# Altium PCB BlasterAmp.PcbDoc
Units mil, origin at the board's own origin, x right, y up, seen from the top; angles counter-clockwise.
Board outline 4720 x 3920 mil, 2 copper layers (Top Layer, Bottom Layer), stack 64.8 mil thick; 78 components, 49 nets, 231 pads, 60 vias.
Unrouted connection lines stored in the file: 41.
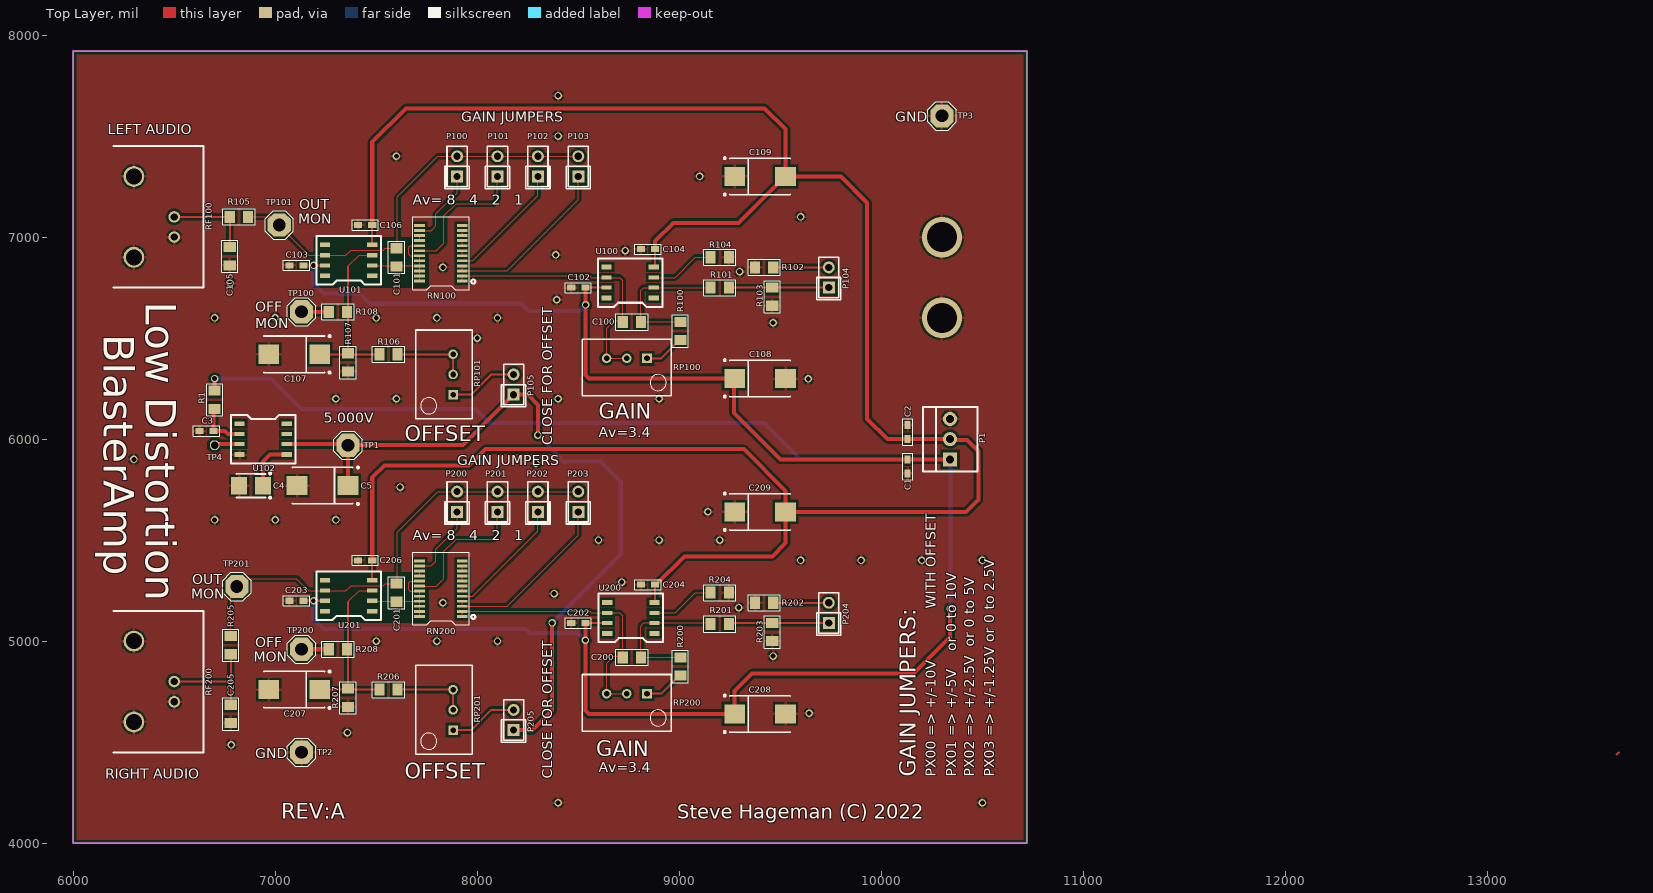
[diagram p0: Top Layer view]
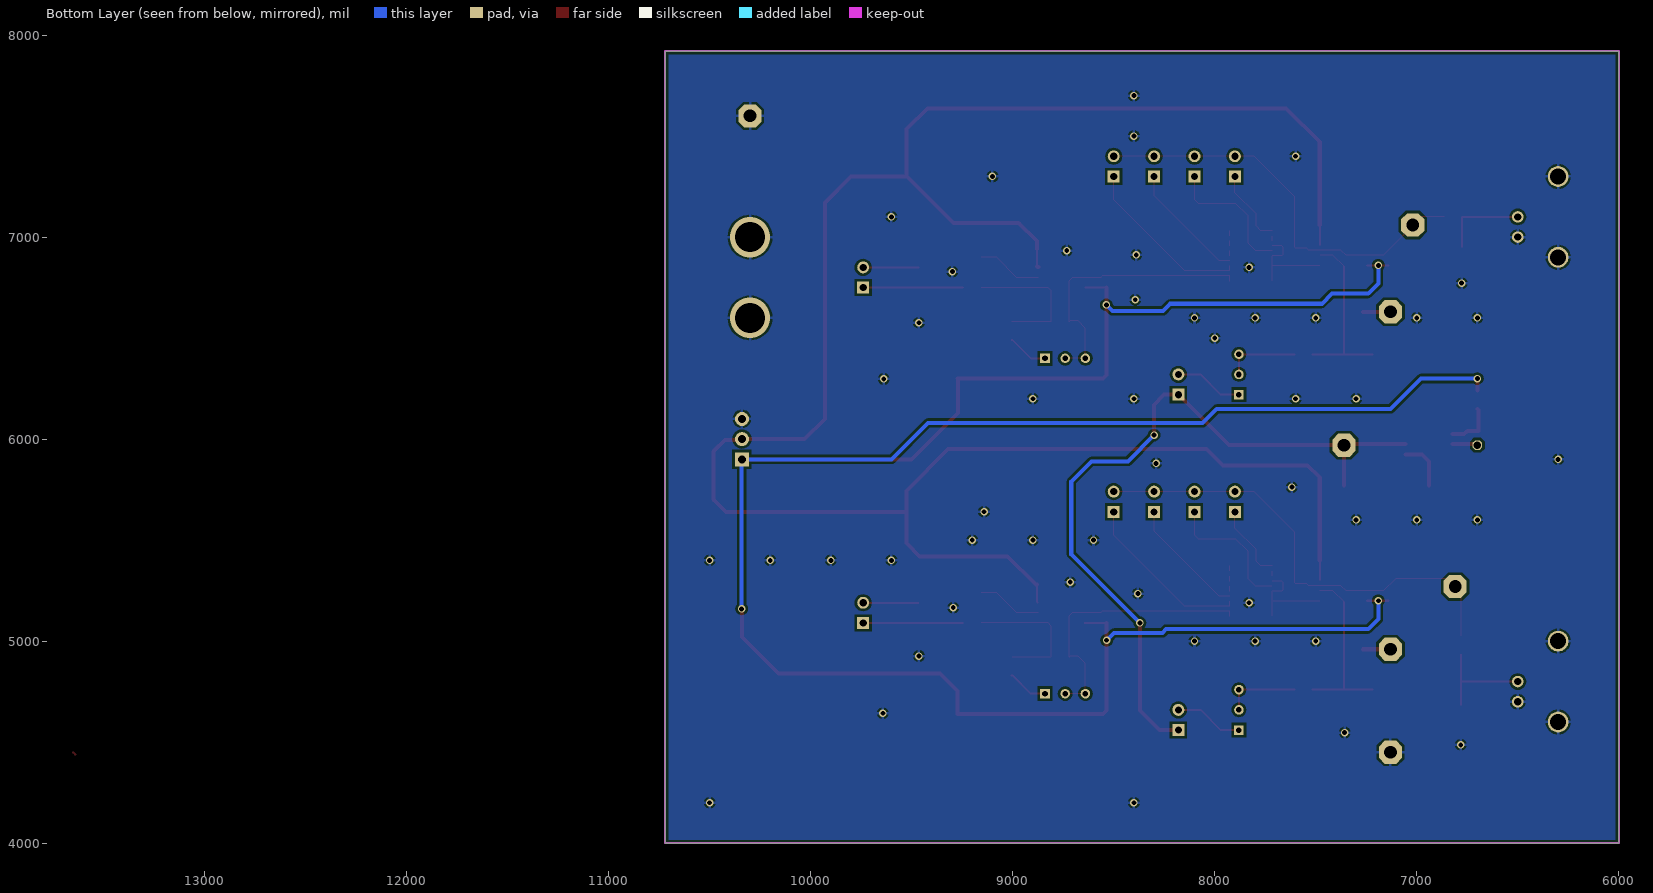
[diagram p1: Bottom Layer view, seen from below]

## Layer stack, top to bottom
Top Solder: solder mask 0.4, Solder Resist, Dk 3.5
Top Layer: signal copper 1.4
Dielectric1: core 62, FR-4, Dk 4.8
Bottom Layer: signal copper 1.4
Bottom Solder: solder mask 0.4, Solder Resist, Dk 3.5

## Board outline
6000,4000 10720,4000 10720,7920 6000,7920

## Design rules (kind name [scope] priority, off if disabled: settings)
BackDrilling [All] p1: maxstublength=120 usetopbackdrill=TRUE usebottombackdrill=TRUE holeoversize=1 holetolplus=0 holetolminus=0
Clearance "Fanout U1" [InComponent('U1')] p1: gap=6 ignorepadtopadclearanceinfootprint=FALSE except(0: Arc-Hole Track-Hole SMDPad-Hole THPad-Hole Via-Hole Fill-Hole Poly-Hole Region-Hole Text-Hole; 15: SMDPad-Via)
Clearance "PAD Keepout" [(InPadClass('All Pads')) vs (InPoly)] p2: gap=12 ignorepadtopadclearanceinfootprint=FALSE except(0: Arc-Hole Track-Hole SMDPad-Hole THPad-Hole Via-Hole Fill-Hole Poly-Hole Region-Hole Text-Hole) // 7 Mil Keepout
Clearance "GND Planes" [(inPoly)] p3: gap=12 ignorepadtopadclearanceinfootprint=FALSE except(0: Arc-Hole Track-Hole SMDPad-Hole THPad-Hole Via-Hole Fill-Hole Poly-Hole Region-Hole Text-Hole) // 12 mil Clearence
Clearance [All] p4: gap=6 ignorepadtopadclearanceinfootprint=FALSE except(0: Arc-Hole Track-Hole SMDPad-Hole THPad-Hole Via-Hole Fill-Hole Poly-Hole Region-Hole Text-Hole)
FanoutControl Fanout_Default [All] p1: bgadir=Out bgaviamode=Centered fanoutstyle=Auto fanoutdirection=OutOnly viagrid=1 // Fanout_Default (Default Rule)
Height [All] p1: minheight=-1 maxheight=1000 prefheight=500
HoleSize [All] p1: absolutevalues=TRUE maxlimit=250 minlimit=8 maxpercent=80.000 minpercent=20.000
HoleToHoleClearance [All] p1: gap=12 allowstackedmicrovias=FALSE
MinimumAnnularRing [All] p1: minimumring=6
MinimumSolderMaskSliver [All] p1: minsoldermaskwidth=3
PlaneClearance [All] p1: clearance=12
PlaneConnect [All] p1: planeconnectstyle=Relief reliefexpansion=12 reliefentries=4 reliefconductorwidth=10 reliefairgap=10
PolygonConnect PolygonConnect_100Pin [InNet('GND') AND InComponent('JC1')] p1: connectstyle=NoConnect reliefconductorwidth=20 reliefentries=4 polygonreliefangle="90 Angle" airgapwidth=10
PolygonConnect PolygonConnect_Gnd_Vias_YIG [InNet('GND') AND IsVia AND (AsMils(PadXSize_AllLayers) =140.0)] p2: connectstyle=Direct reliefconductorwidth=10 reliefentries=4 polygonreliefangle="90 Angle" airgapwidth=10
PolygonConnect PolygonConnect_Gnd_Vias_1 [InNet('GND') AND IsVia AND (AsMils(PadXSize_AllLayers) = 25.0)] p3: connectstyle=Direct reliefconductorwidth=10 reliefentries=4 polygonreliefangle="90 Angle" airgapwidth=10
PolygonConnect PolygonConnect_Gnd_Vias [InNet('GND') AND IsVia AND (AsMils(PadXSize_AllLayers) = 27.0)] p4: connectstyle=Direct reliefconductorwidth=10 reliefentries=4 polygonreliefangle="90 Angle" airgapwidth=10
PolygonConnect PolygonConnect_1206 [InNet('GND') AND IsPad AND (AsMils(PadXSize_AllLayers) = 60.0)] p5: connectstyle=Direct reliefconductorwidth=10 reliefentries=4 polygonreliefangle="90 Angle" airgapwidth=10
PolygonConnect PolygonConnect_5VD_Vias [InNet('+5VD') AND IsVia AND (AsMils(PadXSize_AllLayers) = 23.0)] p6: connectstyle=Direct reliefconductorwidth=10 reliefentries=4 polygonreliefangle="90 Angle" airgapwidth=10
PolygonConnect PolygonConnect_MTG_Holes [InNet('GND') AND IsVia AND (AsMils(PadXSize_AllLayers) = 250.0)] p7: connectstyle=Direct reliefconductorwidth=10 reliefentries=4 polygonreliefangle="90 Angle" airgapwidth=10
PolygonConnect PolygonConnect_Deafult [All] p8: connectstyle=Relief reliefconductorwidth=15 reliefentries=4 polygonreliefangle="90 Angle" airgapwidth=10
RoutingCorners [All] p1: cornerstyle=45-Degree minsetback=50 maxsetback=100
RoutingVias [All] p1: holewidth=12 width=24 viastyle="Through Hole" minholewidth=12 minwidth=24 maxholewidth=250 maxwidth=300
SilkToSilkClearance [All] p1: silktosilkclearance=0
SilkToSolderMaskClearance SilkscreenOverComponentPads [IsPad] p1: minsilkscreentomaskgap=-1 clearancetoexposedcopper=TRUE
SolderMaskExpansion SolderMaskExpansion_VIAS [IsVia] p1: expansion=-3 istentingtop=FALSE
SolderMaskExpansion SolderMaskExpansion_PADS [IsPad] p2: expansion=3 istentingtop=FALSE
SolderMaskExpansion [All] p3: expansion=3 istentingtop=FALSE
ViasUnderSMD [All] p1: allowed=FALSE
Width [All] p1: maxlimit=200 minlimit=6 preferedwidth=10
16 further rules are at their usual default settings.

## Components (designator, comment, footprint, x,y, rotation, side; value= is the part's Value field where it differs from the comment)
C1 "C603-1u" 0603 10130,5865 r90 top
C2 "C603-1u" 0603 10130,6035 r270 top
C3 "C603-1u" 0603 6660,6040 r0 top
C4 "CT-1u-35V" 3528-21 6880,5770 r180 top
C5 "CT-47u-25V" 7343-31 7234.02,5770 r180 top
C100 "C805-" 0805 8765,6580 r180 top
C101 "C805-" 0805 7600,6900 r90 top
C102 "C603-1u" 0603 8500,6750 r180 top
C103 "C603-1u" 0603 7105,6860 r180 top
C104 "C603-1u" 0603 8845,6940 r180 top
C105 "C805-" 0805 6775,6905 r90 top
C106 "C603-1u" 0603 7445,7060 r180 top
C107 "CT-47u-25V" 7343-31 7094.02,6420 r180 top
C108 "CT-47u-25V" 7343-31 9400,6300 r0 top
C109 "CT-47u-25V" 7343-31 9400,7300 r0 top
C200 "C805-" 0805 8765,4920 r180 top
C201 "C805-" 0805 7600,5240 r90 top
C202 "C603-1u" 0603 8500,5090 r180 top
C203 "C603-1u" 0603 7105,5200 r180 top
C204 "C603-1u" 0603 8845,5280 r180 top
C205 "C805-" 0805 6780,4640 r90 top
C206 "C603-1u" 0603 7445,5400 r180 top
C207 "CT-47u-25V" 7343-31 7094.02,4760 r180 top
C208 "CT-47u-25V" 7343-31 9400,4640 r0 top
C209 "CT-47u-25V" 7343-31 9400,5640 r0 top
P1 "PWR-3" HEADER_PWR_3 10340,6000 r90 top
P100 "SIL-2" Header_SIL_2 7900,7300 r90 top
P101 "SIL-2" Header_SIL_2 8100,7300 r90 top
P102 "SIL-2" Header_SIL_2 8300,7300 r90 top
P103 "SIL-2" Header_SIL_2 8500,7300 r90 top
P104 "SIL-2" Header_SIL_2 9740,6750 r90 top
P105 "SIL-2" Header_SIL_2 8180,6220 r90 top
P200 "SIL-2" Header_SIL_2 7900,5640 r90 top
P201 "SIL-2" Header_SIL_2 8100,5640 r90 top
P202 "SIL-2" Header_SIL_2 8300,5640 r90 top
P203 "SIL-2" Header_SIL_2 8500,5640 r90 top
P204 "SIL-2" Header_SIL_2 9740,5090 r90 top
P205 "SIL-2" Header_SIL_2 8180,4560 r90 top
R1 "R805-1k" 0805 6700,6195 r90 top
R100 "R805-1k-0.1%" 0805 9005,6535 r270 top
R101 "R805-300-0.1%" 0805 9200,6750 r180 top
R102 "R805-0" 0805 9420,6850 r0 top
R103 "R805-" 0805 9460,6705 r90 top
R104 "R805-0" 0805 9200,6900 r180 top
R105 "R805-24.9" 0805 6820,7100 r180 top
R106 "R805-1.74k-0.1%" 0805 7560,6420 r0 top
R107 "R805-510-0.1%" 0805 7360,6380 r90 top
R108 "R805-1k-0.1%" 0805 7310,6630 r0 top
R200 "R805-1k-0.1%" 0805 9005,4875 r270 top
R201 "R805-300-0.1%" 0805 9200,5085 r180 top
R202 "R805-0" 0805 9420,5190 r0 top
R203 "R805-" 0805 9460,5045 r90 top
R204 "R805-0" 0805 9200,5240 r180 top
R205 "R805-24.9" 0805 6780,4980 r270 top
R206 "R805-1.74k-0.1%" 0805 7560,4760 r0 top
R207 "R805-510-0.1%" 0805 7360,4720 r90 top
R208 "R805-1k-0.1%" 0805 7310,4960 r0 top
RF100 "BNC-RA-METAL" BNC-RA-METAL 6500,7100 r90 top
RF200 "BNC-RA-METAL" BNC-RA-METAL 6500,4800 r90 top
RN100 "OSOPTC1001AT0" Vishay_24Pin_RNetwork 7820,6920 r180 top
RN200 "OSOPTC1001AT0" Vishay_24Pin_RNetwork 7820,5260 r180 top
RP100 "RP-V-50" POT_3299W 8740,6400 r180 top
RP101 "RP-V-2K" POT_3299W 7880,6320 r90 top
RP200 "RP-V-50" POT_3299W 8740,4740 r180 top
RP201 "RP-V-2K" POT_3299W 7880,4660 r90 top
TP1 "TP5010" TP-RED 7360,5970 r0 top
TP2 "TP5011" TP-BLACK 7130,4450 r0 top
TP3 "TP5011" TP-BLACK 10300,7600 r0 top
TP4 "PAD ONLY" TestPoint 6700,5970 r0 top
TP100 "TP5010" TP-RED 7130,6630 r0 top
TP101 "TP5010" TP-RED 7020,7060 r0 top
TP200 "TP5010" TP-RED 7130,4960 r0 top
TP201 "TP5010" TP-RED 6810,5270 r0 top
U100 "OPA1611AID" SOIC-8 8756.67,6775 r180 top
U101 "OPA1611AID" SOIC-8 7363.33,6885 r180 top
U102 "REF5050AIDR" SOIC-8 6940,6000 r0 top
U200 "OPA1611AID" SOIC-8 8760,5115 r180 top
U201 "OPA1611AID" SOIC-8 7363.33,5225 r180 top

## Footprints (in the part's own frame and the unit in brackets; to place one, negate y for a bottom-side part, rotate by r counter-clockwise, add the part's x,y. Pads: shape width x height; smd on the part's side, far side on the other; paste and mask are expansions set on the pad)
0603 [mil] "0603 Normal Pads"
  rect 40x30 smd: 1(-35,0) 2(35,0)
  silkscreen extent -65,-25 65,25, body extent -36,-16 36,16, height 38
0805 [mil] "0805 Normal Pads"
  rect 50x60 smd: 1(-45,0) 2(45,0)
  silkscreen extent -80,-40 80,40, body extent -41,-26 41,26, height 61
3528-21 [mm] "Tantalum B"
  rect 2x2.2 smd: 1(-1.5,0) 2(1.5,0)
  silkscreen extent -2.54,-1.65 1.85,1.65, body extent -1.81,-1.14 1.94,1.14, height 1.91
7343-31 [mm] "Tantalum D"
  rect 2.6x2.4 smd: 1(-3.2,0) 2(3.2,0)
  silkscreen extent -4.58,-2.4 3.8,2.42, body extent -3.46,-1.91 3.59,1.91, height 2.79
BNC-RA-METAL [mil] "BNC RA METAL"
  round 57 hole 35: 1(0,0) 2(-100,0)
  round 103 hole 79: 3(-200,200) 4(200,200)
  silkscreen extent -350,-145 350,300, body extent -283,-85 283,1309, height 617
HEADER_PWR_3 [mil] "3 PIN POWER HEADER"
  rect 70x70 hole 40: 1(-100,0)
  round 70 hole 40: 2(0,0) 3(100,0)
  silkscreen extent -160,-135 160,135, body extent -150,-123 150,127, height 420
Header_SIL_2 [mm] "2 Pin Header (SIL)"
  rect 1.5x1.5 hole 0.9: 1(0,0)
  round 1.5 hole 0.9: 2(2.54,0)
  silkscreen extent -1.52,-1.52 3.81,1.52, body extent -1.27,-1.27 3.81,1.27, height 5.79
POT_3299W [mm] "POT VERT25 Turn"
  rect 1.2x1.2 hole 0.7: 1(-2.54,0)
  round 1.2 hole 0.7: 2(0,0) 3(2.54,0)
  silkscreen extent -5.59,-2.41 5.59,4.7, body extent -5.08,-1.91 5.08,4.19, height 11.18
SOIC-8 [mm] "SOIC-8 (Linear Tech)"
  rect 1.27x0.6 smd: 1(-2.963,1.945) 4(-2.963,-1.945) 5(2.963,-1.945) 8(2.963,1.945)
  rect 1.27x0.52 smd: 2(-2.963,0.635) 3(-2.963,-0.635) 6(2.963,-0.635) 7(2.963,0.635)
  silkscreen extent -4.06,-3.05 4.06,3.05, body extent -3,-2.45 3,2.45, height 1.6
TestPoint [mil] "Test Point Via Only"
  oct 48x48 hole 36: 1(0,0)
TP-BLACK [mil] "Keystone 5011"
  oct 115x115 hole 63: 1(0,0)
  silkscreen extent -70,-70 70,70, body extent -62,-62 63,63, height 320
TP-RED [mil] "Keystone 5010"
  oct 115x115 hole 63: 1(0,0)
  silkscreen extent -70,-70 70,70, body extent -62,-62 63,63, height 320
Vishay_24Pin_RNetwork [mil] "Vishay 24 Pin R Network"
  rect 53x14 smd paste+0 mask+0: 1(-106,137.5) 2(-106,112.5) 3(-106,87.5) 4(-106,62.5) 5(-106,37.5) 6(-106,12.5) 7(-106,-12.5) 8(-106,-37.5) 9(-106,-62.5) 10(-106,-87.5) 11(-106,-112.5) 12(-106,-137.5) 13(106,-137.5) 14(106,-112.5) 15(106,-87.5) 16(106,-62.5) 17(106,-37.5) 18(106,-12.5) 19(106,12.5) 20(106,37.5) 21(106,62.5) 22(106,87.5) 23(106,112.5) 24(106,137.5)
  silkscreen extent -170,-180 140,180, body extent -118,-172 119,172, height 68

## Part data
C1 C2 C3 C102 C103 C104 C106 C202 C203 C204 C206: library part C0603-2.2u, "2.2uF 16V X5R 85 Deg C 603 Capacitor"
C4: "1uF/35V Tant"
C5 C107 C108 C109 C207 C208 C209: "47uF/25V Tant"
C100 C101 C105 C200 C201 C205: library part C0805, "0805 Capacitor"
P1: library part Header_Pwr_3, "Header PWR 3PIN"
P100 P101 P102 P103 P105 P200 P201 P202 P203 P205: library part "Jumper 2 Pin", "Jumper SIL 2 Pin"
P104 P204: library part Header_SIL_2, "Header SIL 2 Pin"
R1 R100 R101 R102 R103 R104 R105 R106 R107 R108 R200 R201 R202 R203 R204 R205 R206 R207 R208: library part R0805, "0805 Resistor"
RF100 RF200: library part BNC_RA_METAL, "BNC METAL BODY"
RN100 RN200: library part RNETWORK-1K, "Vishay 1k x 12  0.1% R Network"
RP100 RP101 RP200 RP201: library part RP_Vert, "Pot Vert 25 Turn / 3299W"
TP1 TP100 TP101 TP200 TP201: library part TestPoint_Red, "TestPoint W/Red Post"
TP2 TP3: library part TestPoint_Black, "TestPoint W/Black Post"
TP4: library part TestPoint, "TestPoint PCB Pad Only"
U100 U101 U200 U201: "OPAMP SoundPlus RRO +/-18V"
U102: "10.0V REF 0.1% 8ppm 18V"

## Via types
v1: diameter 37, hole 24, Top Layer to Bottom Layer, 58 vias
v2: diameter 200, hole 150, Top Layer to Bottom Layer, 2 vias

## Nets (pads, with @x,y where several pads share a name; then routed paths per layer and width w, separated by ;. In a path a pad name is that pad's centre, name@x,y a point inside that pad or via, vN(x,y) a via of type N, cw(c..) or ccw(c..) an arc to the next point about the centre after c; other vN are vias at no path point)
5Vref: C5.1 P105.1 P205.1 TP1.1 U102.6 | length 3728.6
  Top Layer w20: U102.6 7056.91,5974.76 7355.24,5974.76 TP1.1 ; C5.1 TP1.1 ; P205.1 8272.43,4560 8370,4657.57 v1(8370,5090) ; v1(8300,6020) 8300,6170 8250,6220 P105.1 7930,5970 TP1.1
  Bottom Layer w20: v1(8300,6020) 8430,5890 8610,5890 8710,5790 8710,5430 v1(8370,5090)
GND: C1.1 C2.1 C3.1 C4.2 C5.2 C102.2 C103.2 C104.2 C105.1 C106.2 C107.2 C108.2 C109.1 C202.2 C203.2 C204.2 C205.1 C206.2 C207.2 C208.2 C209.1 P1.3 R102.1 R103.1 R104.1 R107.1 R202.1 R203.1 R204.1 R207.1 RF100.2 RF100.3 RF100.4 RF200.2 RF200.3 RF200.4 TP2.1 TP3.1 U102.4
  other v1: 8400,4200 10500,4200 6782.28,4486.73 7356.92,4547.67 9642.44,4643.45 9463.96,4926.42 7500,5000 7800,5000 8100,5000 9294.18,5165.85 7830,5190 8379.97,5235.51 8715.18,5292.1 9600,5400 9900,5400 10200,5400 10500,5400 8600,5500 8900,5500 9200,5500 6700,5600 7000,5600 7300,5600 9141.81,5640.37 7618.12,5762.26 8290,5880 6300,5900 7300,6200 7600,6200 8400,6200 8900,6200 9638.09,6297.73 8000,6500 9463.96,6576.35 6700,6600 7000,6600 7500,6600 7800,6600 8100,6600 8393.03,6689.54 6777.92,6772.25 9298.53,6828.84 7830,6850 8388.67,6911.56 8732.59,6933.33 9600,7100 9100,7300 7600,7400 8400,7500 8400,7700
  other v2: 10300,6600 10300,7000
NetC3_2: C3.2 R1.1 U102.2 | length 246.6
  Top Layer w20: R1.1 6695,6145 C3.2 6750,6040 6765,6025 U102.2
NetC4_1: C4.1 U102.5 | length 250.9
  Top Layer w20: C4.1 6940,5770.94 6940,5890 6973.43,5923.43 U102.5
NetC100_1: C100.1 R100.1 R101.2 U100.2 | length 701.2
  Top Layer w6: R100.1 C100.1 8810,6735 8825,6750 U100.2 R101.2
NetC100_2: C100.2 RN100.1 RN100.2 RP100.2 RP100.3 U100.6 | length 1379.9
  Top Layer w6: RN100.1 RN100.2 8557.5,6807.5 8565,6800 U100.6 8705,6800 8720,6785 C100.2 8715,6585 8675,6585 8640,6550 RP100.3 RP100.2
NetC101_1: C101.1 RN100.17 RN100.19 RN100.20 RN100.21 RN100.22 RN100.23 RN100.24 U101.2 | length 509.2
  Top Layer w6: U101.2 7482.5,6857.5 7600,6857.5 RN100.21 ; RN100.24 RN100.23 RN100.22 RN100.21 ; RN100.17 7667.5,6957.5 7660,6950 7660,6915 7667.5,6907.5 RN100.19 RN100.20 RN100.21
NetC101_2: C101.2 P100.2 P101.2 P102.2 P103.2 R105.1 TP101.1 U101.6 | length 2063.1
  Top Layer w6: R105.1 6975,7100 7165,6910 U101.6 7350,6910 7375,6935 7535,6935 7545,6945 C101.2 7605,6950 7605,7200 7805,7400 P100.2 P101.2 P102.2 P103.2
NetC105_2: C105.2 R105.2 RF100.1 | length 425
  Top Layer w10: RF100.1 R105.2 C105.2
NetC107_1: C107.1 R106.1 R107.2 R108.2 U101.3 | length 867.8
  Top Layer w6: 7360,6855 7415,6910 U101.3
  Top Layer w10: C107.1 R106.1 ; R107.2 7360,6620 7360,6855
NetC200_1: C200.1 R200.1 R201.2 U200.2 | length 701.2
  Top Layer w6: R200.1 C200.1 8810,5075 8825,5090 8873.35,5090 R201.2@9155,5090
NetC200_2: C200.2 RN200.1 RN200.2 RP200.2 RP200.3 U200.6 | length 1379.9
  Top Layer w6: RN200.1 RN200.2 8557.5,5147.5 8565,5140 8640,5140 8705,5140 8720,5125 C200.2 8715,4925 8675,4925 8640,4890 RP200.3 RP200.2
NetC201_1: C201.1 RN200.17 RN200.19 RN200.20 RN200.21 RN200.22 RN200.23 RN200.24 U201.2 | length 509.2
  Top Layer w6: U201.2 7482.5,5197.5 7600,5197.5 RN200.21 ; RN200.24 RN200.23 RN200.22 RN200.21 ; RN200.17 7667.5,5297.5 7660,5290 7660,5255 7667.5,5247.5 RN200.19 RN200.20 RN200.21
NetC201_2: C201.2 P200.2 P201.2 P202.2 P203.2 R205.1 TP201.1 U201.6 | length 2332.4
  Top Layer w6: R205.1 6780,5230 6860,5310 7105,5310 7165,5250 U201.6 7350,5250 7375,5275 7535,5275 7545,5285 C201.2 7605,5290 7605,5540 7805,5740 P200.2 P201.2 P202.2 P203.2
NetC205_2: C205.2 R205.2 RF200.1 | length 530
  Top Layer w10: RF200.1 6780,4800 ; C205.2 6780,4800 ; R205.2 6780,4800
NetC207_1: C207.1 R206.1 R207.2 R208.2 U201.3 | length 867.8
  Top Layer w6: 7360,5195 7415,5250 U201.3
  Top Layer w10: C207.1 R206.1 ; R207.2 7360,4960 7360,5195
NetP100_1: P100.1 RN100.14 | length 378.8
  Top Layer w6: RN100.14 7772.5,7032.5 7795,7055 7795,7115 7900,7220 P100.1
NetP101_1: P101.1 RN100.18 | length 684.7
  Top Layer w6: RN100.18 7797.5,6932.5 7835,6970 7835,7105 7895,7165 8080,7165 8100,7185 P101.1
NetP102_1: P102.1 RN100.5 | length 602.6
  Top Layer w6: RN100.5 7977.5,6882.5 8300,7205 P102.1
NetP103_1: P103.1 RN100.3 RN100.4 | length 860
  Top Layer w6: RN100.4 RN100.3 8147.5,6832.5 8500,7185 P103.1
NetP104_1: P104.1 R101.1 R103.2 | length 495
  Top Layer w10: R101.1 R103.2 P104.1
NetP104_2: P104.2 R102.2 | length 275
  Top Layer w10: R102.2 P104.2
NetP105_2: P105.2 RP101.1 | length 341.4
  Top Layer w10: RP101.1 7970,6220 8070,6320 P105.2
NetP200_1: P200.1 RN200.14 | length 378.8
  Top Layer w6: RN200.14 7772.5,5372.5 7795,5395 7795,5455 7900,5560 P200.1
NetP201_1: P201.1 RN200.18 | length 684.7
  Top Layer w6: RN200.18 7797.5,5272.5 7835,5310 7835,5445 7895,5505 8080,5505 8100,5525 P201.1
NetP202_1: P202.1 RN200.5 | length 602.6
  Top Layer w6: RN200.5 7977.5,5222.5 8300,5545 P202.1
NetP203_1: P203.1 RN200.3 RN200.4 | length 860
  Top Layer w6: RN200.4 RN200.3 8147.5,5172.5 8500,5525 P203.1
NetP204_1: P204.1 R201.1 R203.2 | length 495
  Top Layer w10: R201.1@9245,5090 R203.2 P204.1
NetP204_2: P204.2 R202.2 | length 275
  Top Layer w10: R202.2 P204.2
NetP205_2: P205.2 RP201.1 | length 341.4
  Top Layer w10: RP201.1 7970,4560 8070,4660 P205.2
NetR100_2: R100.2 RP100.1 | length 202.3
  Top Layer w10: RP100.1 8910,6400 9000,6490 R100.2
NetR104_2: R104.2 U100.3 | length 323.1
  Top Layer w6: U100.3 8980,6800 9080,6900 R104.2
NetR106_2: R106.2 RP101.2 RP101.3 | length 375
  Top Layer w10: R106.2 RP101.3 RP101.2
NetR108_1: R108.1 TP100.1 | length 135
  Top Layer w20: TP100.1 R108.1
NetR200_2: R200.2 RP200.1 | length 202.3
  Top Layer w10: RP200.1 8910,4740 9000,4830 R200.2
NetR204_2: R204.2 U200.3 | length 323.1
  Top Layer w6: U200.3@8873.35,5140 8980,5140 9080,5240 R204.2
NetR206_2: R206.2 RP201.2 RP201.3 | length 375
  Top Layer w10: R206.2 RP201.3 RP201.2
NetR208_1: R208.1 TP200.1 | length 135
  Top Layer w20: TP200.1 R208.1
NetRN100_6: RN100.6 RN100.7 | length 25
  Top Layer w6: RN100.6 RN100.7
NetRN100_8: RN100.8 RN100.9 | length 25
  Top Layer w6: RN100.8 RN100.9
NetRN100_10: RN100.10 RN100.11 | length 25
  Top Layer w6: RN100.10 RN100.11
NetRN100_15: RN100.15 RN100.16 | length 25
  Top Layer w6: RN100.16 RN100.15
NetRN200_6: RN200.6 RN200.7 | length 25
  Top Layer w6: RN200.6 RN200.7
NetRN200_8: RN200.8 RN200.9 | length 25
  Top Layer w6: RN200.8 RN200.9
NetRN200_10: RN200.10 RN200.11 | length 25
  Top Layer w6: RN200.10 RN200.11
NetRN200_15: RN200.15 RN200.16 | length 25
  Top Layer w6: RN200.16 RN200.15
NetTP4_1: TP4.1 U102.3 | length 125.4
  Top Layer w20: TP4.1 6704.76,5974.76 6823.09,5974.76 U102.3
Vcc: C1.2 C102.1 C103.1 C108.1 C202.1 C203.1 C208.1 P1.1 R1.2 U100.7 U101.7 U200.7 U201.7 | length 13141.2
  Top Layer w10: C203.1 v1(7190,5200) U201.7 ; C103.1 v1(7190,6860) U101.7 ; C202.1 U200.7 ; C102.1 U100.7
  Top Layer w20: R1.2 v1(6700,6300) ; C202.1 v1(8535,5004.19) 8535,4657.57 8552.57,4640 C208.1 9274.02,4754.02 9360,4840 10160,4840 10340,5020 v1@10340,5160 ; C102.1 8535,6317.57 8552.57,6300 C108.1 9270,6295.98 9270,6130 9500,5900 C1.2 P1.1
  Bottom Layer w20: v1(6700,6300) 6980,6300 7130,6150 7990,6150 8060,6080 9420,6080 9600,5900 P1.1 10341.46,5898.54 v1(10341.46,5160) ; v1(7190,5200) 7190,5110 7240,5060 8240,5060 8258.79,5041.21 8497.98,5041.21 v1(8535,5004.19) ; v1(7190,6860) 7190,6770 7240,6720 7420,6720 7470,6670 8220.96,6670 8256.46,6634.5 8506.78,6634.5 v1(8536.46,6664.19)
Vee: C2.2 C104.1 C106.1 C109.2 C204.1 C206.1 C209.2 P1.2 U100.4 U101.4 U200.4 U201.4 | length 10953.1
  Top Layer w10: U201.4 C206.1 ; U101.4 C106.1 ; U200.4 8880,5194.9 C204.1 ; U100.4@8880,6853.39 C104.1
  Top Layer w20: C206.1 7480,5810 7540,5870 7960,5870 8040,5950 9320,5950 9525.98,5744.02 C209.2 ; C106.1 7480,7470 7647.57,7637.57 9422.43,7637.57 9525.98,7534.02 C109.2 ; U100.4 8878.19,6851.57 U100.4@8880,6853.39 ; C204.1 8885,5280 9025,5420 9460,5420 9525.98,5485.98 C209.2 ; C104.1 8880,6980 8970,7070 9292.05,7070 9522.05,7300 C109.2 ; C209.2 10420,5640 10480,5700 10480,5940 10425,5995 10345,5995 P1.2 C2.2 10030,6000 9930,6100 9930,7170 9800,7300 C109.2
pads on no net: RN100.12 RN100.13 RN200.12 RN200.13 U100.1 U100.5 U100.8 U101.1 U101.5 U101.8 U102.1 U102.7 U102.8 U200.1 U200.5 U200.8 U201.1 U201.5 U201.8
copper on no net: | length 14.1
  Top Layer w10: 13640,4440 13650,4450

## Polygon pours and split planes (outlines as drawn)
GND on Top Layer "GND_L01_P000" (solid, remove dead copper, pour order 0): 5800,8100 10900,8100 10900,3800 5800,3800
GND on Bottom Layer "GND_L02_P001" (solid, remove dead copper, pour order 1): 5800,8100 10900,8100 10900,3800 5800,3800

## Keep-outs
Keep-Out Layer:
  the board outline again, w10

## Other copper
Top Layer:
  pour cut-out: 7190,5340 7760,5340 7760,5090 7190,5090
  pour cut-out: 7190,7000 7760,7000 7760,6750 7190,6750

## Silkscreen, mask and mechanical layers (free items; w line width, h text height)
Top Overlay:
  text "GAIN JUMPERS" at 7920,7570 h50
  text "GND" at 10070,7570 h50
  text "LEFT AUDIO" at 6170,7510 h50
  text "Av= 8   4   2   1" at 7680,7160 h50
  text "OUT" at 7119.24,7137.71 h50
  text "MON" at 7113.92,7065.61 h50
  text "Low Distortion" at 6360,6680 h150 r270
  text "OFF" at 6900,6630 h50
  text "MON" at 6900,6550 h50
  text "BlasterAmp" at 6150,6520 h150 r270
  text "GAIN" at 8600,6100 h75
  text "5.000V" at 7240,6080 h50
  text "Av=3.4" at 8600,6010 h50
  text "OFFSET" at 7640,5990 h75
  text "CLOSE FOR OFFSET" at 8370,5970 h50 r90
  text "GAIN JUMPERS" at 7900,5870 h50
  text "Av= 8   4   2   1" at 7680,5500 h50
  text "OUT" at 6588.44,5281.56 h50
  text "MON" at 6583.12,5209.46 h50
  text "WITH OFFSET" at 10270,5160 h50 r90
  text "OFF" at 6900,4970 h50
  text "MON" at 6894.67,4897.9 h50
  text "GAIN" at 8590,4430 h75
  text "GND" at 6900,4420 h50
  text "Av=3.4" at 8600,4350 h50
  text "GAIN JUMPERS:" at 10170,4330 h80 r90
  text "PX00 => +/-10V" at 10270,4330 h50 r90
  text "PX01 => +/-5V    or 0 to 10V" at 10370,4330 h50 r90
  text "PX02 => +/-2.5V  or 0 to 5V" at 10460,4330 h50 r90
  text "PX03 => +/-1.25V or 0 to 2.5V" at 10560,4330 h50 r90
  text "RIGHT AUDIO" at 6159.27,4319.73 h50
  text "OFFSET" at 7640,4320 h75
  text "CLOSE FOR OFFSET" at 8370,4320 h50 r90
  text "REV:A" at 7030,4120 h75
  text "Steve Hageman (C) 2022" at 8990,4120 h70
PCB_Outline_1:
  the board outline again, w10
Assy_Top_3:
  text "ASSY TOP" at 14320,550 h200
Assy_Bot_4:
  text "ASSY BOT" at 15730,560 h200
Drawing_Sheet_16:
  lines w1: 13803,500 16803,500 ; 13803,800 16803,800 ; 200,200 16800,200 16800,10800 200,10800 200,200
  lines w5: 13803,209 13803,809 13803,1409 16803,1409 16803,209 ; 15903,209 15903,809
  lines w10: 0,-11 9997,-11
  text "TITLE:" at 13853,709 h45
  text "REV:" at 15953,709 h45
  text ".PRINT_DATE" at 15960,520 h50
  text "DWG NO:" at 13853,409 h45
  text "DIMENSIONS IN MILS" at 16054,328 h45
Drill Drawing:
  text ".LEGEND" at 600,700 h70
  text "NOTE: 'HOLE SIZE' means 'FINISHED HOLE SIZE'" at 581,568 h70
  text "FAB DOC" at 14320,550 h200

## Dimensions
6000,4000 to 6000,7920 on PCB_Outline_1
6000,4000 to 10720,4000 on PCB_Outline_1